# EAGLE board UltrasonicSensor (EAGLE 9.5.2)
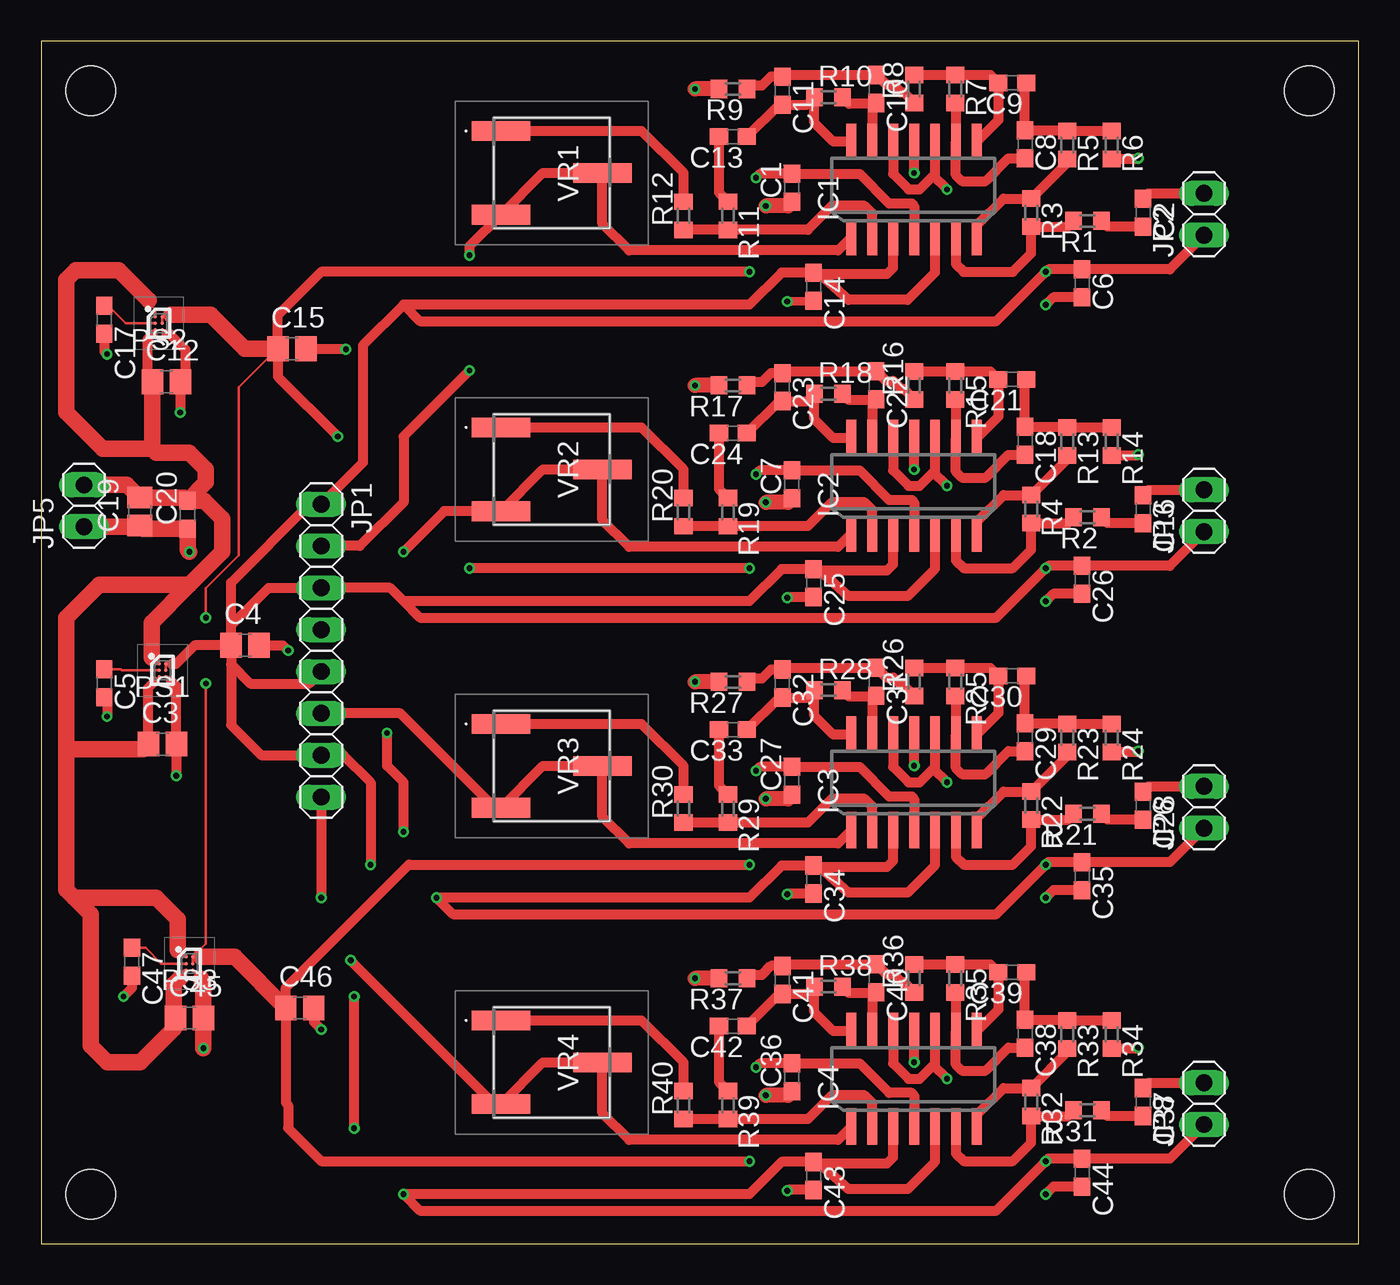
[diagram p0: board, top side]
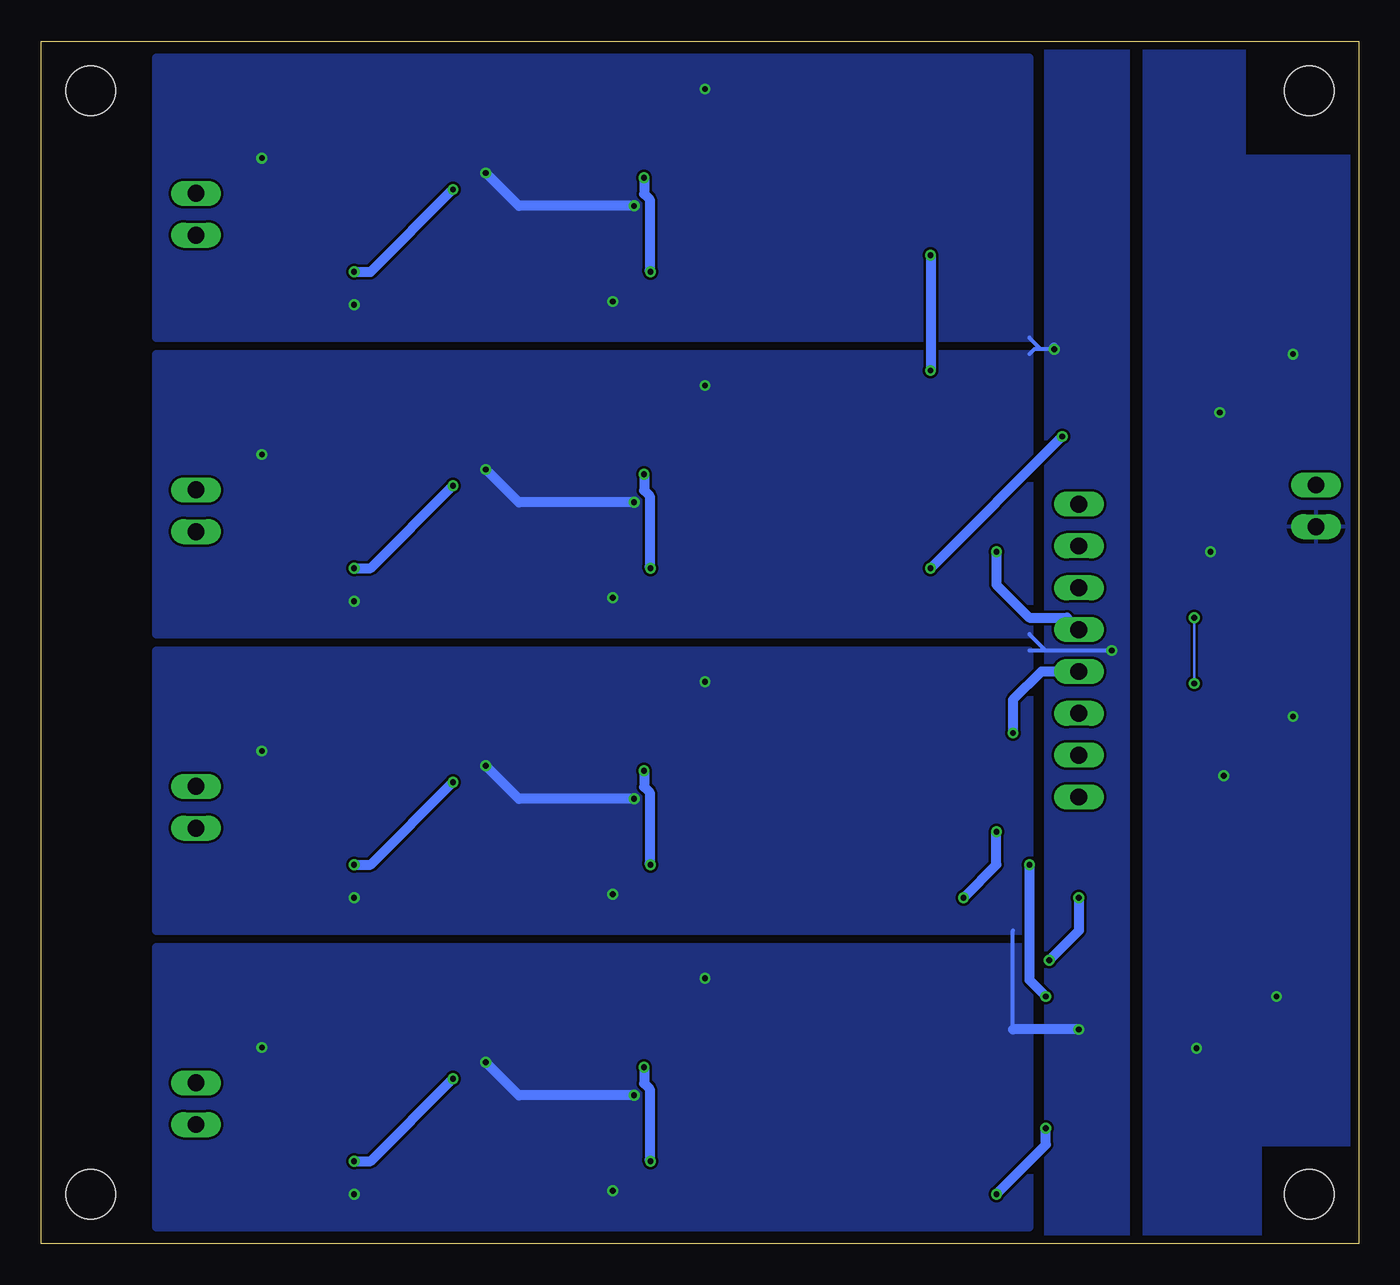
[diagram p1: board, bottom side, seen from below]

Size 80 x 73 mm. Coordinates in mm from the lower left corner, seen from the top.
Outline: 0,0 80,0 80,73 0,73 0,0
Copper layers (1*16): Top 0.035mm / dielectric 1.6mm / Bottom 0.035mm
Design rules "Elecrow_2-layer_PCB_eagle_rule": minimum track width 6mil, minimum drill 12mil, track to track 6mil, track to pad 6mil, pad to pad 6mil, via to via 8mil, smd to smd 0mil, copper to edge 20mil, drill to drill 10mil, minimum pad ring 6mil, minimum via ring 6mil, stop-mask expansion 0mil, vias tented up to drill 100mil, thermal gap 10mil
Holes 3 mm at 3,3 3,70 77,70 77,3

## Footprints (pad centres in the part's own frame; a part is rotated, then mirrored left to right if it is on the bottom)
C1608 = smd 1.1 x 1: 1 -0.85,0; 2 0.85,0
C2012 = smd 1.3 x 1.5: 1 -0.85,0; 2 0.85,0
NJM2734M = smd 0.6 x 2.2: 1 -3.81,-2.9; 2 -2.54,-2.9; 3 -1.27,-2.9; 4 0,-2.9; 5 1.27,-2.9; 6 2.54,-2.9; 7 3.81,-2.9; 8 3.81,2.9; 9 2.54,2.9; 10 1.27,2.9; 11 0,2.9; 12 -1.27,2.9; 13 -2.54,2.9; 14 -3.81,2.9
1X08 = drill 1.016 long: 1 -8.89,0; 2 -6.35,0; 3 -3.81,0; 4 -1.27,0; 5 1.27,0; 6 3.81,0; 7 6.35,0; 8 8.89,0
1X02 = drill 1.016 long: 1 -1.27,0; 2 1.27,0
BGA6C40P2X3_95X116X56 = smd 0.208 x 0.208: A1 -0.2,0.4; A2 0.2,0.4; B1 -0.2,0; B2 0.2,0; C1 -0.2,-0.4; C2 0.2,-0.4
R0603 = smd 1 x 1.1: 1 -0.85,0; 2 0.85,0
3361P1253GLF = smd 1.19 x 3.55: 1 -2.54,-3.075; 2 0,3.075; 3 2.54,-3.075

## Placement (x,y rotation side)
C1  0.1u  [C1608]  45.59,64.09 90 top
C2  0.1u  [C1608]  66.91,62.59 270 top
C3  10u  [C2012]  7.36,30.32 0 top
C4  10u  [C2012]  12.38,36.32 0 top
C5  1000p  [C1608]  3.83,34.02 270 top
C6  0.1u  [C1608]  63.2,58.3 270 top
C7  0.1u  [C1608]  45.59,46.09 90 top
C8  1000p  [C1608]  59.73,66.74 270 top
C9  1000p  [C1608]  58.96,70.47 180 top
C10  1000p  [C1608]  50.7,70.1 270 top
C11  1000p  [C1608]  45,70 270 top
C12  10u  [C2012]  7.6,52.32 0 top
C13  0.1u  [C1608]  42,67.2 180 top
C14  0.1u  [C1608]  46.9,58.1 270 top
C15  10u  [C2012]  15.22,54.32 0 top
C16  0.1u  [C1608]  66.91,44.59 270 top
C17  1000p  [C1608]  3.83,56.08 270 top
C18  1000p  [C1608]  59.73,48.74 270 top
C19  10u  [C2012]  5.98,44.44 90 top
C20  0.1u  [C1608]  8.89,44.25 90 top
C21  1000p  [C1608]  58.96,52.47 180 top
C22  1000p  [C1608]  50.7,52.1 270 top
C23  1000p  [C1608]  45,52 270 top
C24  0.1u  [C1608]  42,49.2 180 top
C25  0.1u  [C1608]  46.9,40.1 270 top
C26  0.1u  [C1608]  63.2,40.3 270 top
C27  0.1u  [C1608]  45.59,28.09 90 top
C28  0.1u  [C1608]  66.91,26.59 270 top
C29  1000p  [C1608]  59.73,30.74 270 top
C30  1000p  [C1608]  58.96,34.47 180 top
C31  1000p  [C1608]  50.7,34.1 270 top
C32  1000p  [C1608]  45,34 270 top
C33  0.1u  [C1608]  42,31.2 180 top
C34  0.1u  [C1608]  46.9,22.1 270 top
C35  0.1u  [C1608]  63.2,22.3 270 top
C36  0.1u  [C1608]  45.59,10.09 90 top
C37  0.1u  [C1608]  66.91,8.59 270 top
C38  1000p  [C1608]  59.73,12.74 270 top
C39  1000p  [C1608]  58.96,16.47 180 top
C40  1000p  [C1608]  50.7,16.1 270 top
C41  1000p  [C1608]  45,16 270 top
C42  0.1u  [C1608]  42,13.2 180 top
C43  0.1u  [C1608]  46.9,4.1 270 top
C44  0.1u  [C1608]  63.2,4.3 270 top
C45  10u  [C2012]  9,13.7 0 top
C46  10u  [C2012]  15.7,14.3 0 top
C47  1000p  [C1608]  5.5,17.1 270 top
IC1  [NJM2734M]  53,64 0 top
IC2  [NJM2734M]  53,46 0 top
IC3  [NJM2734M]  53,28 0 top
IC4  [NJM2734M]  53,10 0 top
JP1  [1X08]  17,36 270 top
JP2  [1X02]  70.6,62.49 90 top
JP3  [1X02]  70.6,44.49 90 top
JP5  [1X02]  2.6,44.79 90 top
JP6  [1X02]  70.6,26.49 90 top
JP8  [1X02]  70.6,8.49 90 top
PS1  ADP7112ACBZ-2.5-R7  [BGA6C40P2X3_95X116X56]  7.36,34.8 0 top
PS2  ADP7112ACBZ-5.0-R7  [BGA6C40P2X3_95X116X56]  7.14,55.88 0 top
PS3  ADP7112ACBZ-5.0-R7  [BGA6C40P2X3_95X116X56]  9,17 0 top
R1  10k  [R0603]  63.53,62.09 180 top
R2  10k  [R0603]  63.53,44.09 180 top
R3  1M  [R0603]  60.11,62.59 270 top
R4  1M  [R0603]  60.11,44.59 270 top
R5  15k  [R0603]  62.3,66.7 270 top
R6  330  [R0603]  65,66.7 270 top
R7  39k  [R0603]  55.5,70.1 270 top
R8  18k  [R0603]  53,70.1 90 top
R9  390  [R0603]  42,70.1 180 top
R10  47k  [R0603]  47.8,69.6 0 top
R11  10k  [R0603]  41.7,62.4 270 top
R12  10k  [R0603]  39,62.4 90 top
R13  15k  [R0603]  62.3,48.7 270 top
R14  330  [R0603]  65,48.7 270 top
R15  39k  [R0603]  55.5,52.1 270 top
R16  18k  [R0603]  53,52.1 90 top
R17  390  [R0603]  42,52.1 180 top
R18  47k  [R0603]  47.8,51.6 0 top
R19  10k  [R0603]  41.7,44.4 270 top
R20  10k  [R0603]  39,44.4 90 top
R21  10k  [R0603]  63.53,26.09 180 top
R22  1M  [R0603]  60.11,26.59 270 top
R23  15k  [R0603]  62.3,30.7 270 top
R24  330  [R0603]  65,30.7 270 top
R25  39k  [R0603]  55.5,34.1 270 top
R26  18k  [R0603]  53,34.1 90 top
R27  390  [R0603]  42,34.1 180 top
R28  47k  [R0603]  47.8,33.6 0 top
R29  10k  [R0603]  41.7,26.4 270 top
R30  10k  [R0603]  39,26.4 90 top
R31  10k  [R0603]  63.53,8.09 180 top
R32  1M  [R0603]  60.11,8.59 270 top
R33  15k  [R0603]  62.3,12.7 270 top
R34  330  [R0603]  65,12.7 270 top
R35  39k  [R0603]  55.5,16.1 270 top
R36  18k  [R0603]  53,16.1 90 top
R37  390  [R0603]  42,16.1 180 top
R38  47k  [R0603]  47.8,15.6 0 top
R39  10k  [R0603]  41.7,8.4 270 top
R40  10k  [R0603]  39,8.4 90 top
VR1  3361P-1-504GLF  [3361P1253GLF]  31,65 270 top
VR2  3361P-1-504GLF  [3361P1253GLF]  31,47 270 top
VR3  3361P-1-504GLF  [3361P1253GLF]  31,29 270 top
VR4  3361P-1-504GLF  [3361P1253GLF]  31,11 270 top

## Library data of the parts
C1-C47 = rcl; SPICEPREFIX: C
IC1-IC4 = linear3
JP1-JP3 JP5 JP6 JP8 = pinhead
PS1-PS3 = ADP7112ACBZ-3.3-R7; ARROW_PART_NUMBER: ADP7112ACBZ-3.3-R7; DESCRIPTION: LDO Voltage Regulators 20V 200mA LDO 3.3Vo; HEIGHT: 0.56mm; MANUFACTURER_NAME: Linear Technology; MANUFACTURER_PART_NUMBER: ADP7112ACBZ-3.3-R7; MOUSER_PART_NUMBER: 584-ADP7112ACBZ3.3R7; MOUSER_PRICE-STOCK: https://www.mouser.com/Search/Refine.aspx?Keyword=584-ADP7112ACBZ3.3R7
R1-R40 = rcl; SPICEPREFIX: R
VR1-VR4 = 3361P-1-504GLF; DESCRIPTION: BOURNS - 3361P-1-504GLF - Product Range:AEC-Q200 3361P Series; HEIGHT: 5.84mm; MANUFACTURER_NAME: Bourns; MANUFACTURER_PART_NUMBER: 3361P-1-504GLF; MOUSER_PART_NUMBER: 652-3361P-1-504GLF; MOUSER_PRICE-STOCK: https://www.mouser.co.uk/ProductDetail/Bourns/3361P-1-504GLF?qs=fqIB%2FsSTfTaKxcvNNIdl2Q%3D%3D

## Nets
+9V: C3.1 C12.1 C19.2 C20.2 C45.1 JP5.2 PS1.A1 PS1.C1 PS2.A1 PS2.C1 PS3.A1 PS3.C1
AGND: C1.1 C4.2 C6.2 C7.1 C14.2 C15.2 C25.2 C26.2 C27.1 C34.2 C35.2 C36.1 C43.2 C44.2 C46.2 IC1.11 IC2.11 IC3.11 IC4.11 R6.2 R9.2 R14.2 R17.2 R24.2 R27.2 R34.2 R37.2
GND: C3.2 C5.2 C12.2 C17.2 C19.1 C20.1 C45.2 C47.2 JP5.1 PS1.C2 PS2.C2 PS3.C2
N$1: C16.2 R2.1
N$2: C13.2 R11.1
N$3: C2.2 R1.1
N$4: C2.1 JP2.2
N$5: IC1.6 R1.2 R3.2
N$6: C5.1 PS1.B1
N$7: C8.1 C9.1 R5.1 R6.1
N$8: C8.2 IC1.9 R7.2
N$9: IC1.2 R11.2 R12.1
N$10: IC1.7 R3.1 R5.2
N$11: C9.2 IC1.8 R7.1 R8.2
N$12: C10.1 C11.1 R8.1 R9.1
N$13: C10.2 IC1.13 R10.2
N$14: C11.2 C13.1 IC1.14 R10.1
N$15: R12.2 VR1.1
N$16: IC1.1 JP1.2 VR1.2 VR1.3
N$17: C16.1 JP3.2
N$18: IC2.7 R4.1 R13.2
N$19: C18.1 C21.1 R13.1 R14.1
N$20: IC2.6 R2.2 R4.2
N$21: C18.2 IC2.9 R15.2
N$22: C21.2 IC2.8 R15.1 R16.2
N$23: C22.1 C23.1 R16.1 R17.1
N$24: C22.2 IC2.13 R18.2
N$25: C23.2 C24.1 IC2.14 R18.1
N$26: C24.2 R19.1
N$27: IC2.2 R19.2 R20.1
N$28: R20.2 VR2.1
N$29: IC2.1 JP1.4 VR2.2 VR2.3
N$30: C28.2 R21.1
N$31: C28.1 JP6.2
N$32: IC3.7 R22.1 R23.2
N$33: C29.1 C30.1 R23.1 R24.1
N$34: C17.1 PS2.B1
N$35: IC3.6 R21.2 R22.2
N$36: C29.2 IC3.9 R25.2
N$37: C30.2 IC3.8 R25.1 R26.2
N$38: C31.1 C32.1 R26.1 R27.1
N$39: C31.2 IC3.13 R28.2
N$40: C32.2 C33.1 IC3.14 R28.1
N$41: C33.2 R29.1
N$42: IC3.2 R29.2 R30.1
N$43: R30.2 VR3.1
N$44: IC3.1 JP1.6 VR3.2 VR3.3
N$45: C37.2 R31.1
N$46: C37.1 JP8.2
N$47: IC4.7 R32.1 R33.2
N$48: C38.1 C39.1 R33.1 R34.1
N$49: IC4.6 R31.2 R32.2
N$50: C38.2 IC4.9 R35.2
N$51: C39.2 IC4.8 R35.1 R36.2
N$52: C40.1 C41.1 R36.1 R37.1
N$53: C40.2 IC4.13 R38.2
N$54: C41.2 C42.1 IC4.14 R38.1
N$55: C42.2 R39.1
N$56: IC4.2 R39.2 R40.1
N$57: R40.2 VR4.1
N$58: IC4.1 JP1.8 VR4.2 VR4.3
N$59: C47.1 PS3.B1
VCC: C1.2 C7.2 C15.1 C27.2 C36.2 C46.1 IC1.4 IC2.4 IC3.4 IC4.4 PS2.A2 PS2.B2 PS3.A2 PS3.B2
VCC/2: C4.1 C6.1 C14.1 C25.1 C26.1 C34.1 C35.1 C43.1 C44.1 IC1.3 IC1.5 IC1.10 IC1.12 IC2.3 IC2.5 IC2.10 IC2.12 IC3.3 IC3.5 IC3.10 IC3.12 IC4.3 IC4.5 IC4.10 IC4.12 JP1.1 JP1.3 JP1.5 JP1.7 JP2.1 JP3.1 JP6.1 JP8.1 PS1.A2 PS1.B2

## Tracks (layer width: path | path; a pad name or v marks a point on that pad's centre or on a via)
+9V
  Top 0.152: PS2.C1 6.75,55.29 6.75,55.2 | 6.88,34.12 PS1.C1 | 6.54,57.26 6.54,57.08 6.94,56.68 PS2.A1 | PS3.C1 8.7,16.6 8.4,16.3 8.4,16.1 | 8.3,17.8 8.7,17.4 PS3.A1 | PS1.A1 7.06,35.2 6.7,35.56
  Top 0.61: 6.75,55.2 6.45,54.9 6.45,52.62 C12.1 | C3.1 6.51,33.75 6.88,34.12
  Top 1.016: JP5.2 5.21,46.06 C19.2 8.7,45.29 C20.2 | C20.2 10,46.21 10,47 9,48 7,48 6.75,48.25 | C12.1 6.75,48.25 | 6.75,48.25 3.75,48.25 1.52,50.48 1.52,58.52 2.1,59.1 4.7,59.1 6.54,57.26 | 8.4,16.1 8.05,15.75 8.05,13.8 | 8.05,13.8 C45.1 | C20.2 9.9,45.1 11,44 11,42 9,40 | 1.52,30 1.52,38 3.52,40 9,40 | 1.52,30 1.52,21.48 2,21 | 2,21 7,21 8.3,19.7 8.3,17.8 | 2,21 3,20 3,12 4,11 6,11 8.05,13.05 8.05,13.8 | 9,40 6.7,37.7 6.7,35.56 | C3.1 6.19,30 1.52,30
AGND  (via drill 0.35)
  Top 0.508: C14.2 arc-45 46.78,57.2 v45.3,57.2
  Top 0.61: v53,65 IC1.11 | R6.2 66.55,65.85 v66.6,65.9 | C6.2 61.45,57.45 v61,57 | v53,47 IC2.11 | v45.3,39.2 45.35,39.25 C25.2 | R14.2 66.55,47.85 v66.6,47.9 | C26.2 61.45,39.45 v61,39 | v53,29 IC3.11 | v45.3,21.2 45.35,21.25 C34.2 | R24.2 66.55,29.85 v66.6,29.9 | C35.2 61.45,21.45 v61,21 | v53,11 IC4.11 | v45.3,3.2 45.35,3.25 C43.2 | R34.2 66.55,11.85 v66.6,11.9 | C44.2 61.45,3.45 v61,3 | C15.2 18.38,54.32 18.4,54.3 v18.5,54.3 | C46.2 16.55,13.45 v17,13 | C4.2 14.68,36.32 v15,36
  Top 0.914: C1.1 45.35,63 v44,63 | R9.2 v39.7,70.1 | C7.1 45.35,45 v44,45 | R17.2 v39.7,52.1 | C27.1 45.35,27 v44,27 | R27.2 v39.7,34.1 | C36.1 45.35,9 v44,9 | R37.2 v39.7,16.1
  Bottom 0.254: 20,37 19,36 v15,36 20,36 | 20,55 19.3,54.3 v18.5,54.3 19.7,54.3 20,54 | 21,13 21,19
  Bottom 0.61: v44,63 51,63 v53,65 | v44,45 51,45 v53,47 | v44,27 51,27 v53,29 | v44,9 51,9 v53,11 | v18.5,54.3 18.5,54.4 | v17,13 21,13
  pour Bottom: 20,72 20,55 73,55 73,72
  pour Bottom: 20,54 20,37 73,37 73,54
  pour Bottom: 20,36 20,19 73,19 73,36
  pour Bottom: 20,18 20,1 73,1 73,18
  pour Bottom: 14,73 19,73 19,0 14,0
GND  (via drill 0.35)
  Top 0.152: 7.61,55.21 PS2.C2 | 7.88,34.18 7.66,34.4 PS1.C2 | 9.72,16.08 9.7,16.1 PS3.C2
  Top 0.61: 7.61,55.21 7.81,55.21 8.75,54.27 8.75,52.62 C12.2 v8.45,50.45 | 7.88,34.18 8.21,33.85 C3.2 v8.21,28.41 v8.2,28.4 | C17.2 3.83,54.17 v4,54 | C5.2 4,33 v4,32 | C47.2 5.5,15.5 v5,15
  Top 1.016: JP5.1 5.91,43.52 C19.1 6.17,43.4 C20.1 8.89,42.11 v9,42 | 9.72,16.08 9.77,15.82 9.85,15.9 C45.2 v9.85,11.85
  pour Bottom: 7,73 7,66 0,66 0,6 6,6 6,0 13,0 13,73
N$1
  Top 0.61: C16.2 64.73,43.74 R2.1
N$2
  Top 0.61: C13.2 41.15,63.8 R11.1
N$3
  Top 0.61: C2.2 64.73,61.74 R1.1
N$4
  Top 0.61: C2.1 67.23,63.76 JP2.2
N$5
  Top 0.61: IC1.6 55.54,59.46 56,59 59,59 60.11,60.11 R3.2 62.33,61.74 R1.2
N$6
  Top 0.152: PS1.B1 4.9,34.8 4.83,34.87 C5.1
N$7
  Top 0.61: R6.1 R5.1 62.26,67.59 C8.1 59.73,70.39 C9.1
N$8
  Top 0.61: C8.2 58.73,65.89 57.34,64.5 55.9,64.5 55.54,64.86 IC1.9 55.54,69.21 R7.2
N$9
  Top 0.61: R12.1 R11.2 46.55,61.55 48,63 50,63 50.46,62.54 IC1.2
N$10
  Top 0.61: IC1.7 56.81,61.81 58.44,63.44 R3.1 62.3,65.63 R5.2
N$11
  Top 0.61: IC1.8 58.11,68.2 C9.2 57.63,70.95 R7.1 R8.2
N$12
  Top 0.61: R9.1 43.05,70.3 43.75,70.3 44.3,70.85 C11.1 45.1,70.95 C10.1 50.75,70.95 51.34,70.36 51.75,70.36 52.22,69.89 52.36,69.89 R8.1
N$13
  Top 0.61: IC1.13 50.46,69.01 C10.2 50.65,69.2 49.05,69.2 R10.2
N$14
  Top 0.61: IC1.14 48.1,66.9 46.95,68.05 R10.1 46.5,69.15 C11.2 44.8,69.15 C13.1
N$15
  Top 0.61: R12.2 39,65 36.46,67.54 VR1.1
N$16  (via drill 0.35)
  Top 0.61: IC1.1 48.39,60.3 35.7,60.3 34.08,61.92 VR1.2 30.46,65 VR1.3 26,60.53 v26,60 | JP1.2 19.35,42.35 22,45 22,49 v26,53
  Bottom 0.61: v26,60 v26,53
N$17
  Top 0.61: C16.1 67.23,45.76 JP3.2
N$18
  Top 0.61: IC2.7 56.81,43.81 58.44,45.44 R4.1 62.3,47.63 R13.2
N$19
  Top 0.61: R14.1 R13.1 62.26,49.59 C18.1 59.73,52.39 C21.1
N$20
  Top 0.61: IC2.6 55.54,41.46 56,41 59,41 60.11,42.11 R4.2 62.33,43.74 R2.2
N$21
  Top 0.61: C18.2 58.73,47.89 57.34,46.5 55.9,46.5 55.54,46.86 IC2.9 55.54,51.21 R15.2
N$22
  Top 0.61: IC2.8 58.11,50.2 C21.2 57.63,52.95 R15.1 R16.2
N$23
  Top 0.61: R17.1 43.05,52.3 43.75,52.3 44.3,52.85 C23.1 45.1,52.95 C22.1 50.75,52.95 51.34,52.36 51.75,52.36 52.22,51.89 52.36,51.89 R16.1
N$24
  Top 0.61: IC2.13 50.46,51.01 C22.2 50.65,51.2 49.05,51.2 R18.2
N$25
  Top 0.61: IC2.14 48.1,48.9 46.95,50.05 R18.1 46.5,51.15 C23.2 44.8,51.15 C24.1
N$26
  Top 0.61: C24.2 41.15,45.8 R19.1
N$27
  Top 0.61: R20.1 R19.2 46.55,43.55 48,45 50,45 50.46,44.54 IC2.2
N$28
  Top 0.61: R20.2 39,47 36.46,49.54 VR2.1
N$29  (via drill 0.35)
  Top 0.61: IC2.1 48.39,42.3 35.7,42.3 34.08,43.92 VR2.2 30.46,47 VR2.3 24.46,44.46 v22,42
  Bottom 0.61: v22,42 22,40 20,38 17.73,38 JP1.4
N$30
  Top 0.61: C28.2 64.73,25.74 R21.1
N$31
  Top 0.61: C28.1 67.23,27.76 JP6.2
N$32
  Top 0.61: IC3.7 56.81,25.81 58.44,27.44 R22.1 62.3,29.63 R23.2
N$33
  Top 0.61: R24.1 R23.1 62.26,31.59 C29.1 59.73,34.39 C30.1
N$34
  Top 0.152: PS2.B1 5.12,55.88 4.07,56.93 C17.1
N$35
  Top 0.61: IC3.6 55.54,23.46 56,23 59,23 60.11,24.11 R22.2 62.33,25.74 R21.2
N$36
  Top 0.61: C29.2 58.73,29.89 57.34,28.5 55.9,28.5 55.54,28.86 IC3.9 55.54,33.21 R25.2
N$37
  Top 0.61: IC3.8 58.11,32.2 C30.2 57.63,34.95 R25.1 R26.2
N$38
  Top 0.61: R27.1 43.05,34.3 43.75,34.3 44.3,34.85 C32.1 45.1,34.95 C31.1 50.75,34.95 51.34,34.36 51.75,34.36 52.22,33.89 52.36,33.89 R26.1
N$39
  Top 0.61: IC3.13 50.46,33.01 C31.2 50.65,33.2 49.05,33.2 R28.2
N$40
  Top 0.61: IC3.14 48.1,30.9 46.95,32.05 R28.1 46.5,33.15 C32.2 44.8,33.15 C33.1
N$41
  Top 0.61: C33.2 41.15,27.8 R29.1
N$42
  Top 0.61: R30.1 R29.2 46.55,25.55 48,27 50,27 50.46,26.54 IC3.2
N$43
  Top 0.61: R30.2 39,29 36.46,31.54 VR3.1
N$44
  Top 0.61: IC3.1 48.39,24.3 35.7,24.3 34.08,25.93 VR3.2 30.46,29 VR3.3 27.54,26.46 21.81,32.19 JP1.6
N$45
  Top 0.61: C37.2 64.73,7.74 R31.1
N$46
  Top 0.61: C37.1 67.23,9.76 JP8.2
N$47
  Top 0.61: IC4.7 56.81,7.81 58.44,9.44 R32.1 62.3,11.63 R33.2
N$48
  Top 0.61: R34.1 R33.1 62.26,13.59 C38.1 59.73,16.39 C39.1
N$49
  Top 0.61: IC4.6 55.54,5.46 56,5 59,5 60.11,6.11 R32.2 62.33,7.74 R31.2
N$50
  Top 0.61: C38.2 58.73,11.89 57.34,10.5 55.9,10.5 55.54,10.86 IC4.9 55.54,15.21 R35.2
N$51
  Top 0.61: IC4.8 58.11,14.2 C39.2 57.63,16.95 R35.1 R36.2
N$52
  Top 0.61: R37.1 43.05,16.3 43.75,16.3 44.3,16.85 C41.1 45.1,16.95 C40.1 50.75,16.95 51.34,16.36 51.75,16.36 52.22,15.89 52.36,15.89 R36.1
N$53
  Top 0.61: IC4.13 50.46,15.01 C40.2 50.65,15.2 49.05,15.2 R38.2
N$54
  Top 0.61: IC4.14 48.1,12.9 46.95,14.05 R38.1 46.5,15.15 C41.2 44.8,15.15 C42.1
N$55
  Top 0.61: C42.2 41.15,9.8 R39.1
N$56
  Top 0.61: R40.1 R39.2 46.55,7.55 48,9 50,9 50.46,8.54 IC4.2
N$57
  Top 0.61: R40.2 39,11 36.46,13.54 VR4.1
N$58  (via drill 0.35)
  Top 0.61: IC4.1 48.39,6.3 35.7,6.3 34.08,7.92 VR4.2 30.46,11 VR4.3 27.52,8.46 18.8,17.18 v18.8,17.2 | JP1.8 v17,21
  Bottom 0.61: v17,21 17,19 v18.8,17.2
N$59
  Top 0.152: C47.1 6.35,17.95 7.3,17 PS3.B1
VCC  (via drill 0.35)
  Top 0.152: 7.9,56.4 7.46,56.4 PS2.A2 PS2.B2 | 9.7,17.4 9.5,17.2 9.4,17.2 PS3.A2 | PS3.A2 PS3.B2 | C15.1 14.32,54.32 12,52 12,41.8 10,39.8 v10,38 | v10,34 10,18.2 PS3.A2
  Top 0.61: IC1.4 53,63 52.86,63.14 51.49,63.14 49.69,64.94 C1.2 43.64,64.94 v43.4,64.7 | IC2.4 53,45 52.86,45.14 51.49,45.14 49.69,46.94 C7.2 43.64,46.94 v43.4,46.7 | v43,41 v26,41 | IC3.4 53,27 52.86,27.14 51.49,27.14 49.69,28.94 C27.2 43.64,28.94 v43.4,28.7 | IC4.4 53,9 52.86,9.14 51.49,9.14 49.69,10.94 C36.2 43.64,10.94 v43.4,10.7 | v43,5 17,5 15,7 15,8.4 14.85,8.55 C46.1 14.85,15.53 22.32,23 v43,23 | v43,59 17,59 14.37,56.37 C15.1 14.37,52.63 v18,49
  Top 1.016: 7.9,56.4 10.29,56.4 12.37,54.32 C15.1 | C46.1 11.75,17.4 9.7,17.4
  Bottom 0.152: v10,38 v10,34
  Bottom 0.61: v43.4,64.7 43.4,63.73 43.06,63.39 43.06,59.06 v43,59 | v43.4,46.7 43.4,45.73 43.06,45.39 43.06,41.06 v43,41 | v43.4,28.7 43.4,27.73 43.06,27.39 43.06,23.06 v43,23 | v43.4,10.7 43.4,9.72 43.06,9.39 43.06,5.06 v43,5 | v26,41 v18,49
VCC/2  (via drill 0.35)
  Top 0.152: PS1.B2 PS1.A2 7.66,35.3 7.8,35.3 7.9,35.2
  Top 0.61: C14.1 47.07,58.85 51.35,58.85 51.73,59.23 IC1.3 | C14.1 47,58.85 47.29,58.85 49.03,57.3 52.6,57.3 54.27,58.97 IC1.5 | IC1.12 51.73,64.94 52.67,64 53.33,64 54.16,64.84 | 54.16,64.84 54.27,64.94 IC1.10 | JP2.1 68.53,59.15 C6.1 61.15,59.15 v61,59 58,56 23,56 22,57 | v55,64 54.16,64.84 | C14.1 44.95,58.95 43,57 22,57 | C25.1 47.07,40.85 51.35,40.85 51.73,41.23 IC2.3 | C25.1 47,40.85 47.29,40.85 49.03,39.3 52.6,39.3 54.27,40.97 IC2.5 | IC2.12 51.73,46.95 52.67,46 53.33,46 54.16,46.84 | 54.16,46.84 54.27,46.95 IC2.10 | JP3.1 68.53,41.15 C26.1 61.15,41.15 v61,41 58,38 23,38 22,39 | v55,46 54.16,46.84 | C25.1 44.95,40.95 43,39 22,39 | C34.1 47.07,22.85 51.35,22.85 51.73,23.23 IC3.3 | C34.1 47,22.85 47.29,22.85 49.03,21.3 52.6,21.3 54.27,22.97 IC3.5 | IC3.12 51.73,28.95 52.67,28 53.33,28 54.16,28.84 | 54.16,28.84 54.27,28.95 IC3.10 | JP6.1 68.53,23.15 C35.1 61.15,23.15 v61,23 58,20 25,20 v24,21 43,21 44.95,22.95 C34.1 | v55,28 54.16,28.84 | C43.1 47.07,4.85 51.35,4.85 51.73,5.23 IC4.3 | C43.1 47,4.85 47.29,4.85 49.03,3.3 52.6,3.3 54.27,4.97 IC4.5 | IC4.12 51.73,10.95 52.67,10 53.33,10 54.16,10.84 | 54.16,10.84 54.27,10.95 IC4.10 | JP8.1 68.53,5.15 C44.1 61.15,5.15 v61,5 58,2 23,2 v22,3 43,3 44.95,4.95 C43.1 | v55,10 54.16,10.84 | v22,25 22,28 21,29 v21,31 | v19,7 v19,15 | v20,23 20,28 18.35,29.65 JP1.7 13.35,29.65 11.53,31.47 C4.1 | 22,39 21.19,39.81 JP1.3 13.81,39.81 11.53,37.53 C4.1 | 22,57 19.53,54.53 19.53,47.42 JP1.1 16.29,44.89 11.53,40.13 C4.1 | C4.1 11.53,35.17 12.7,34 16.27,34 JP1.5 | C4.1 9.32,36.32 8.2,35.2 7.9,35.2
  Bottom 0.61: v61,59 60,59 v55,64 | v61,41 60,41 v55,46 | v61,23 60,23 v55,28 | v61,5 60,5 v55,10 | v22,25 22,23 v24,21 | JP1.5 19.27,34.73 21,33 v21,31 | v22,3 19,6 v19,7 | v19,15 20,16 v20,23